# Altium PCB analogtestboard3.PCBDOC (part 3 of 3)
Units mil, origin at the board's own origin, x right, y up, seen from the top; angles counter-clockwise.
Board outline 10000 x 10000 mil, 4 copper layers (Top Layer, Internal Plane 1, Internal Plane 2, Bottom Layer); 448 components, 227 nets, 1474 pads, 451 vias.
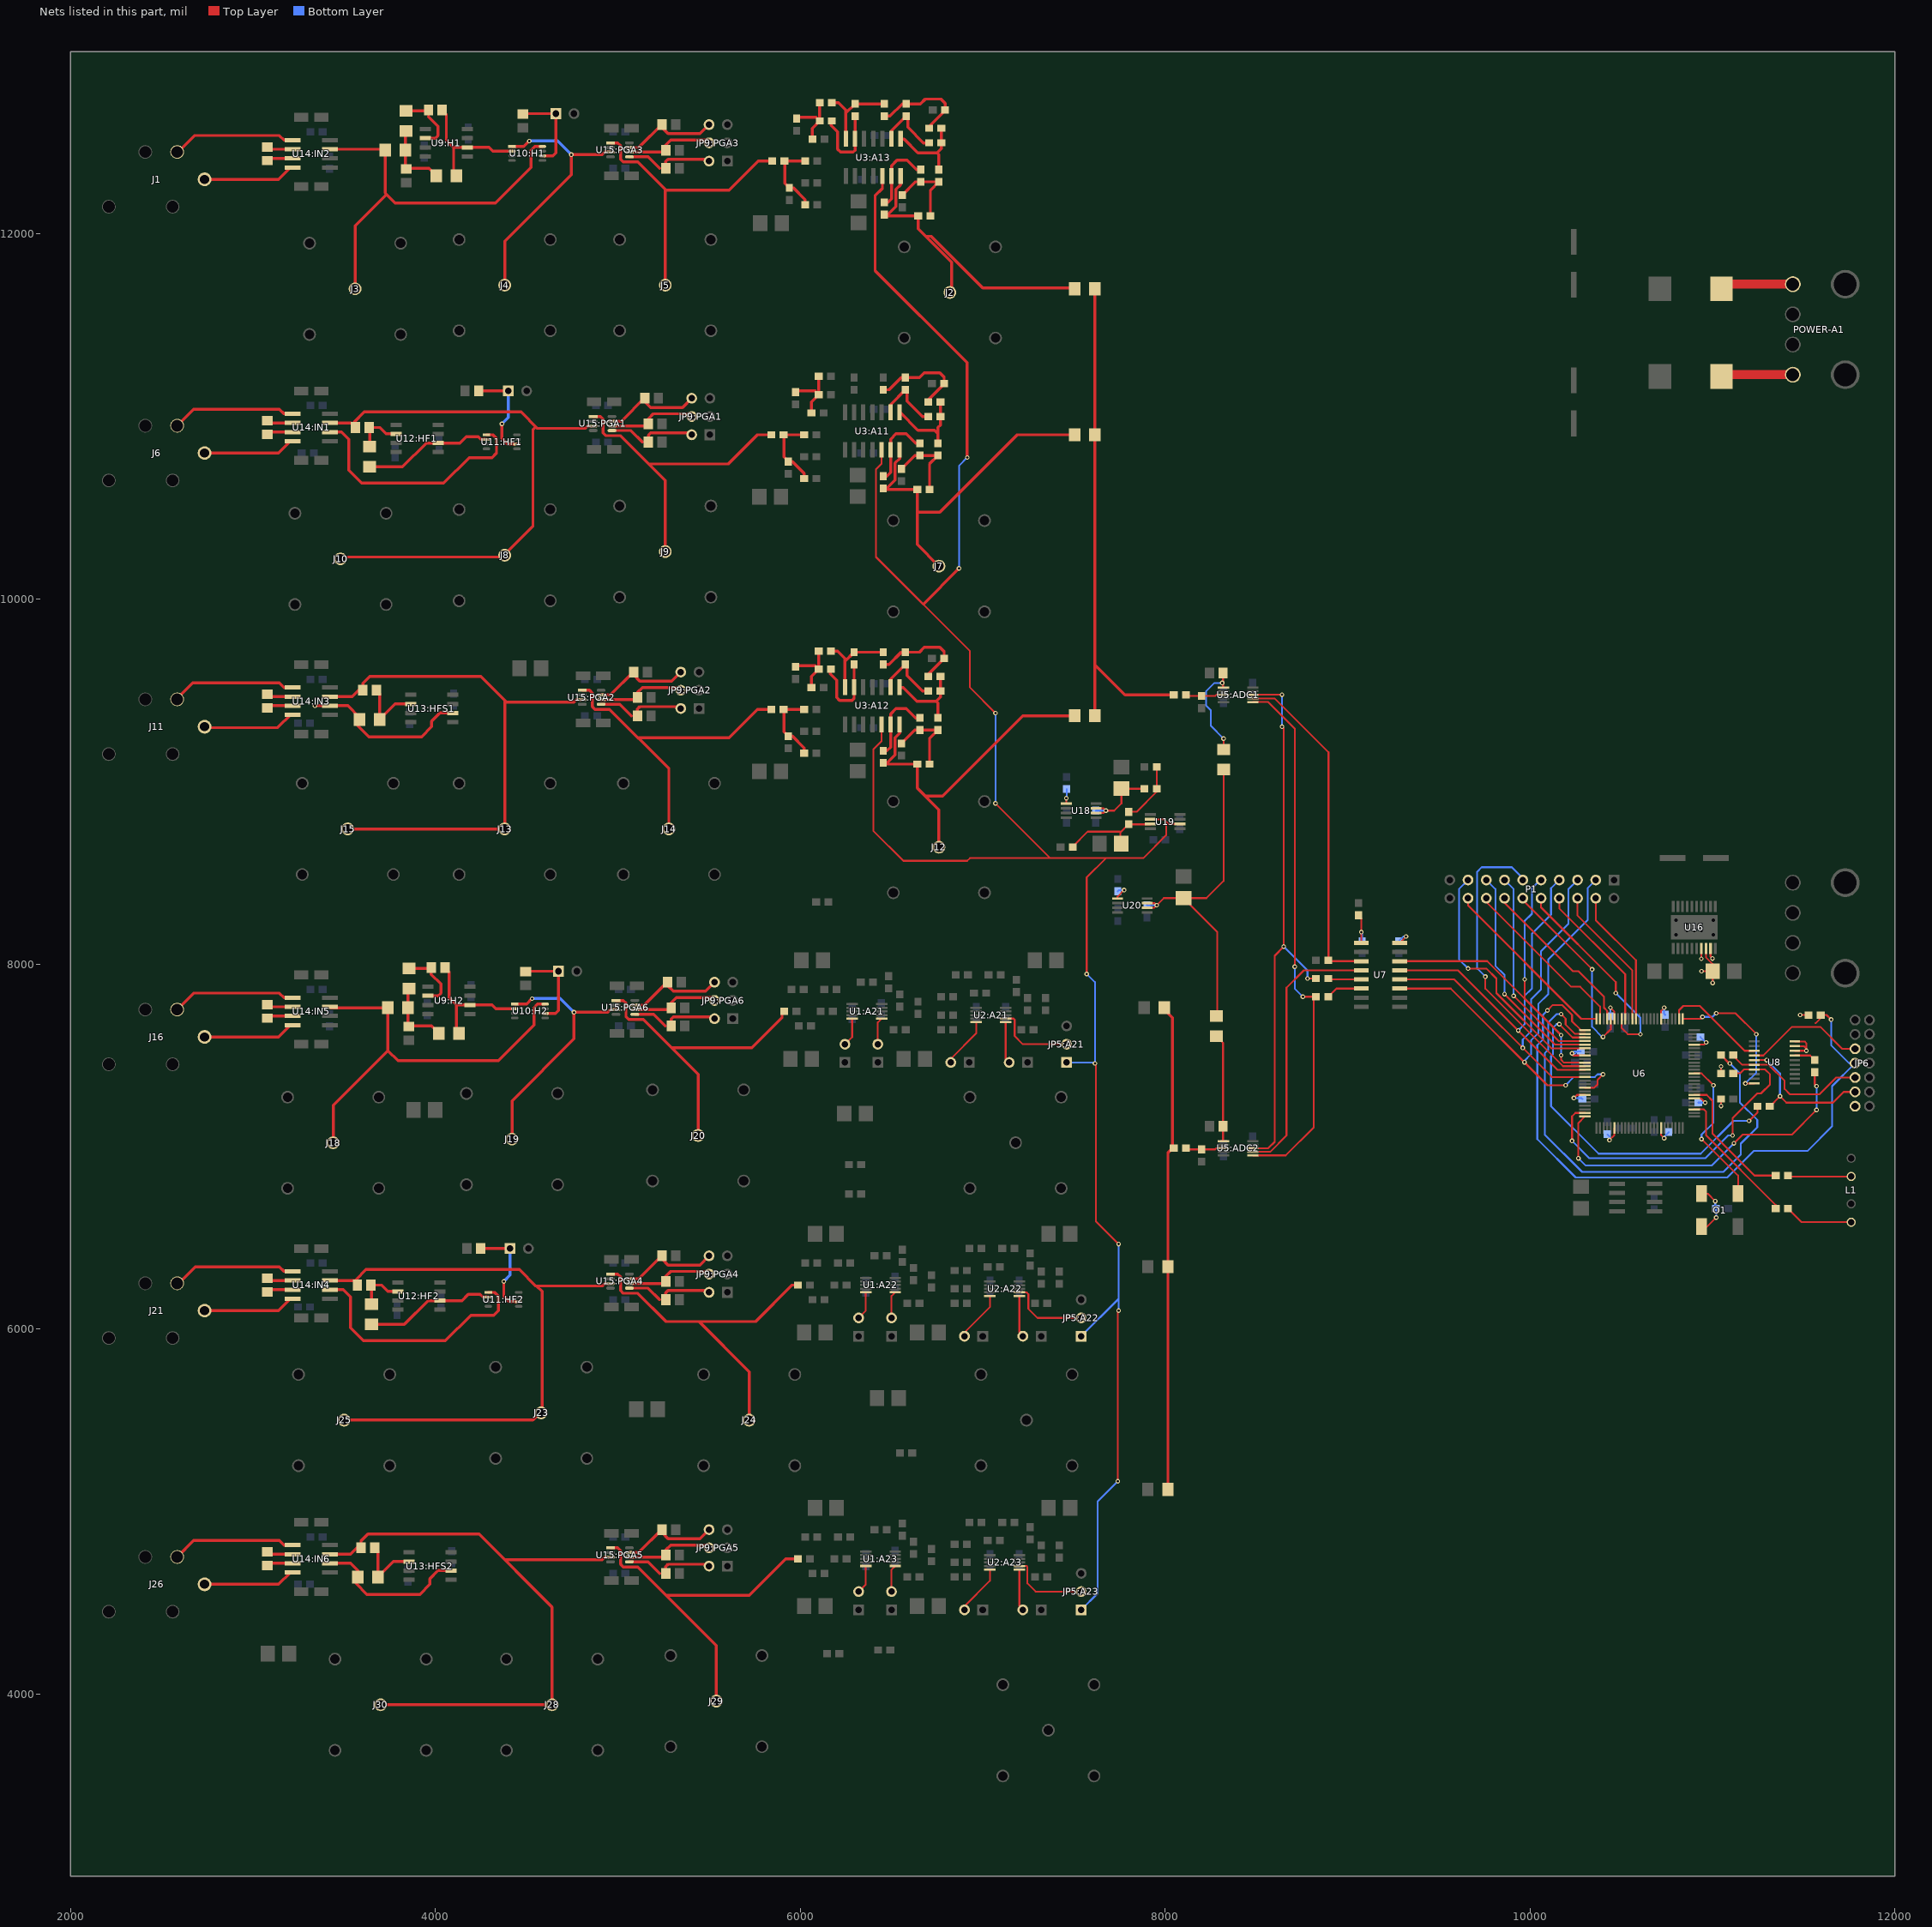
[diagram p5: the nets of this part, all layers, seen from the top]

## Via types
v1: diameter 25, hole 13.5, Top Layer to Bottom Layer, 398 vias
v2: diameter 35, hole 20, Top Layer to Bottom Layer, 53 vias

## Nets (pads, with @x,y where several pads share a name; then routed paths per layer and width w, separated by ;. In a path a pad name is that pad's centre, name@x,y a point inside that pad or via, vN(x,y) a via of type N, cw(c..) or ccw(c..) an arc to the next point about the centre after c; other vN are vias at no path point) (continued)
NetC18:A12_1: C18:A12.1 R14:A12.1 R21:A12.1 U3:A12.14 | length 489.9
  Top Layer w16: R14:A12.1@6168.46,9715 6205,9715 6245,9675 U3:A12.14@6245,9517.36 ; 6245,9658.46 C18:A12.1@6295,9708.46 ; C18:A12.1@6286.54,9708.46 R21:A12.1@6455,9708.46
NetC18:A12_2: C18:A12.2 R20:A12.2 U3:A12.13 | length 474.9
  Top Layer w16: R20:A12.2@6165,9615 6165,9590 6200,9555 6200,9460 6215,9445 6285,9445 6295,9455 C18:A12.2@6295,9655
NetC18:A13_1: C18:A13.1 R14:A13.1 R21:A13.1 U3:A13.14 | length 489.9
  Top Layer w16: R14:A13.1@6173.46,12720 6210,12720 6250,12680 U3:A13.14@6250,12522.36 ; 6250,12663.46 C18:A13.1@6300,12713.46 ; C18:A13.1@6291.54,12713.46 R21:A13.1@6460,12713.46
NetC18:A13_2: C18:A13.2 R20:A13.2 U3:A13.13 | length 474.9
  Top Layer w16: R20:A13.2@6170,12620 6170,12595 6205,12560 6205,12465 6220,12450 6290,12450 6300,12460 C18:A13.2@6300,12660
NetC19:A11_1: C19:A11.1 R15:A11.1 R23:A11.1 U3:A11.8 | length 490.7
  Top Layer w16: U3:A11.8@6545,11022.36 6547.64,11022.36 6645,10925 6735,10925 6755,10905 ; R23:A11.1@6755,10853.46 6755,10940 6768.46,10953.46 R15:A11.1@6768.46,11080
NetC19:A11_2: C19:A11.2 R22:A11.2 U3:A11.9 | length 379.7
  Top Layer w16: U3:A11.9@6495,11022.36 6495,11066.54 R22:A11.2@6575,11146.54 6583.46,11146.54 6585,11145 6585,11085 6670,11000 C19:A11.2@6701.54,11000
NetC19:A12_1: C19:A12.1 R15:A12.1 R23:A12.1 U3:A12.8 | length 472.4
  Top Layer w16: U3:A12.8@6545,9517.36 6547.36,9515 6565,9515 6640,9440 6745,9440 ; R23:A12.1@6755,9348.46 6755,9430 6745,9440 ; R15:A12.1@6768.46,9575 C19:A12.1@6768.46,9495 6768.46,9463.46 6745,9440
NetC19:A12_2: C19:A12.2 R22:A12.2 U3:A12.9 | length 379.7
  Top Layer w16: U3:A12.9@6495,9517.36 6495,9561.54 R22:A12.2@6575,9641.54 6583.46,9641.54 6585,9640 6585,9580 6670,9495 C19:A12.2@6701.54,9495
NetC19:A13_1: C19:A13.1 R15:A13.1 R23:A13.1 U3:A13.8 | length 472.4
  Top Layer w16: U3:A13.8@6550,12522.36 6552.36,12520 6570,12520 6645,12445 6750,12445 ; R23:A13.1@6760,12353.46 6760,12435 6750,12445 ; R15:A13.1@6773.46,12580 C19:A13.1@6773.46,12500 6773.46,12468.46 6750,12445
NetC19:A13_2: C19:A13.2 R22:A13.2 U3:A13.9 | length 379.7
  Top Layer w16: U3:A13.9@6500,12522.36 6500,12566.54 R22:A13.2@6580,12646.54 6588.46,12646.54 6590,12645 6590,12585 6675,12500 C19:A13.2@6706.54,12500
NetC20:A11_1: C20:A11.1 J7.1 R16:A11.1 R46.1 U3:A11.7 | length 1920.1
  Top Layer w16: C20:A11.1@6470,10600 R16:A11.1@6641.54,10600 6641.54,10298.46 J7.1@6760,10180 ; 6475,10606.54 6520,10651.54 6520,10745 6545,10770 U3:A11.7@6545,10817.64 ; 6641.54,10475 6765,10475 7190,10900 R46.1@7504.88,10900
NetC20:A11_2: C20:A11.2 R24:A11.2 U3:A11.6 | length 403.6
  Top Layer w16: 6475,10673.46 6495,10693.46 U3:A11.6@6495,10817.64 6495,10875 6525,10905 6580,10905 6631.54,10853.46 R24:A11.2@6655,10853.46
NetC20:A12_1: C20:A12.1 J12.1 R16:A12.1 R48.1 U3:A12.7 | length 1917.7
  Top Layer w16: C20:A12.1@6470,9095 R16:A12.1@6641.54,9095 6641.54,8963.46 6760,8845 J12.1@6760,8640 ; 6475,9101.54 6520,9146.54 6520,9240 6545,9265 U3:A12.7@6545,9312.64 ; 6685.31,8919.69 6779.69,8919.69 7220,9360 R48.1@7504.88,9360
NetC20:A12_2: C20:A12.2 R24:A12.2 U3:A12.6 | length 403.6
  Top Layer w16: 6475,9168.46 6495,9188.46 U3:A12.6@6495,9312.64 6495,9370 6525,9400 6580,9400 6631.54,9348.46 R24:A12.2@6655,9348.46
NetC20:A13_1: C20:A13.1 J2.1 R16:A13.1 R45.1 U3:A13.7 | length 1842.7
  Top Layer w16: C20:A13.1@6475,12100 R16:A13.1@6646.54,12100 6646.54,12028.46 6830,11845 J2.1@6830,11690 ; 6480,12106.54 6525,12151.54 6525,12245 6550,12270 U3:A13.7@6550,12317.64 ; 6687.11,11987.89 6717.11,11987.89 7000,11705 R45.1@7515,11705
NetC20:A13_2: C20:A13.2 R24:A13.2 U3:A13.6 | length 403.6
  Top Layer w16: 6480,12173.46 6500,12193.46 U3:A13.6@6500,12317.64 6500,12375 6530,12405 6585,12405 6636.54,12353.46 R24:A13.2@6660,12353.46
NetC21:A11_2: C21:A11.2 R13:A11.2 R17:A11.2 R18:A11.1 | length 421.9
  Top Layer w16: R17:A11.2@5908.46,10900 R18:A11.1@6021.54,10900 ; R17:A11.2@5910,10910 5910,10778.46 C21:A11.2@5935,10753.46 5956.54,10753.46 6021.54,10688.46 R13:A11.2@6021.54,10660
NetC21:A12_2: C21:A12.2 R13:A12.2 R17:A12.2 R18:A12.1 | length 421.9
  Top Layer w16: R17:A12.2@5908.46,9395 R18:A12.1@6021.54,9395 ; R17:A12.2@5910,9405 5910,9273.46 C21:A12.2@5935,9248.46 5956.54,9248.46 6021.54,9183.46 R13:A12.2@6021.54,9155
NetC21:A13_2: C21:A13.2 R13:A13.2 R17:A13.2 R18:A13.1 | length 421.9
  Top Layer w16: R17:A13.2@5913.46,12400 R18:A13.1@6026.54,12400 ; R17:A13.2@5915,12410 5915,12278.46 C21:A13.2@5940,12253.46 5961.54,12253.46 6026.54,12188.46 R13:A13.2@6026.54,12160
NetC22:A11_2: C22:A11.2 R14:A11.2 R19:A11.2 R20:A11.1 | length 328.1
  Top Layer w16: C22:A11.2@5970,11140 6081.54,11140 ; R19:A11.2@6061.54,11020 6061.54,11080 R20:A11.1@6101.54,11120 R14:A11.2@6101.54,11220
NetC22:A12_2: C22:A12.2 R14:A12.2 R19:A12.2 R20:A12.1 | length 328.1
  Top Layer w16: C22:A12.2@5970,9635 6081.54,9635 ; R19:A12.2@6061.54,9515 6061.54,9575 R20:A12.1@6101.54,9615 R14:A12.2@6101.54,9715
NetC22:A13_2: C22:A13.2 R14:A13.2 R19:A13.2 R20:A13.1 | length 328.1
  Top Layer w16: C22:A13.2@5975,12640 6086.54,12640 ; R19:A13.2@6066.54,12520 6066.54,12580 R20:A13.1@6106.54,12620 R14:A13.2@6106.54,12720
NetC23:A11_2: C23:A11.2 R15:A11.2 R21:A11.2 R22:A11.1 | length 542.9
  Top Layer w16: R21:A11.2@6455,11146.54 6486.54,11146.54 6553.46,11213.46 6653.46,11213.46 6680,11240 6765,11240 6788.46,11216.54 6788.46,11178.46 R15:A11.2@6701.54,11091.54
NetC23:A12_2: C23:A12.2 R15:A12.2 R21:A12.2 R22:A12.1 | length 542.9
  Top Layer w16: R21:A12.2@6455,9641.54 6486.54,9641.54 6553.46,9708.46 6653.46,9708.46 6680,9735 6765,9735 6788.46,9711.54 6788.46,9673.46 R15:A12.2@6701.54,9586.54
NetC23:A13_2: C23:A13.2 R15:A13.2 R21:A13.2 R22:A13.1 | length 542.9
  Top Layer w16: R21:A13.2@6460,12646.54 6491.54,12646.54 6558.46,12713.46 6658.46,12713.46 6685,12740 6770,12740 6793.46,12716.54 6793.46,12678.46 R15:A13.2@6706.54,12591.54
NetC24:A11_2: C24:A11.2 R16:A11.2 R23:A11.2 R24:A11.1 | length 436.1
  Top Layer w16: C24:A11.2@6555,10713.46 6628.07,10786.54 R24:A11.1@6655,10786.54 R23:A11.2@6755,10786.54 6708.46,10740 R16:A11.2@6708.46,10600
NetC24:A12_2: C24:A12.2 R16:A12.2 R23:A12.2 R24:A12.1 | length 436.1
  Top Layer w16: C24:A12.2@6555,9208.46 6628.07,9281.54 R24:A12.1@6655,9281.54 R23:A12.2@6755,9281.54 6708.46,9235 R16:A12.2@6708.46,9095
NetC24:A13_2: C24:A13.2 R16:A13.2 R23:A13.2 R24:A13.1 | length 436.1
  Top Layer w16: C24:A13.2@6560,12213.46 6633.07,12286.54 R24:A13.1@6660,12286.54 R23:A13.2@6760,12286.54 6713.46,12240 R16:A13.2@6713.46,12100
NetC33:ADC1_2: C33:ADC1.2 R47.1 U5:ADC1.1 | length 544
  Top Layer w10: U5:ADC1.1@8317.4,9516.26 C33:ADC1.2@8317.4,9595 ; R47.1@8320,9175.12 v1(8320,9235)
  Bottom Layer w10: v1(8312.4,9540) 8270,9540 8225,9495 8225,9415 8250,9390 8250,9305 v1(8320,9235)
NetC33:ADC2_2: C33:ADC2.2 R51.1 U5:ADC2.1 | length 589.1
  Top Layer w10: R51.1@8280,7604.88 8317.4,7567.48 U5:ADC2.1@8317.4,7031.26
NetC36:ADC1_2: C36:ADC1.2 R25:ADC1.2 U5:ADC1.3 | length 211.2
  Top Layer w10: R25:ADC1.2@8113.46,9475 8120,9468.46 8273.46,9468.46 8280,9475 U5:ADC1.3@8319.29,9475
NetC36:ADC2_2: C36:ADC2.2 R25:ADC2.2 U5:ADC2.3 | length 211.2
  Top Layer w10: R25:ADC2.2@8113.46,6990 8120,6983.46 8273.46,6983.46 8280,6990 U5:ADC2.3@8319.29,6990
NetC37_2: C37.2 R26.1 U7.1 | length 188.5
  Top Layer w10: U7.1@9074.68,8115 R26.1@9074.68,8251.85
  Bottom Layer w10: v1(9074.68,8174.68) 9080,8169.37 C37.2@9080,8125.21
NetC55:H1_1: C55:H1.1 R38:H1.1 U9:H1.6 U10:H1.2 | length 720.7
  Top Layer w16: R38:H1.1@4037.4,12680 4060,12657.4 4060,12515 4100,12475 ; C55:H1.1@4115.12,12320 4100,12335.12 4100,12475 ; U10:H1.2@4420,12454.41 4315.59,12454.41 4295,12475 4100,12475
NetC55:H1_2: C55:H1.2 C57:H1.1 C58:H1.2 R39:H1.2 | length 389.3
  Top Layer w16: R39:H1.2@3835.12,12362.28 C58:H1.2@3835.12,12570.12 ; R39:H1.2@3840,12360 3964.88,12360 C55:H1.2@4004.88,12320
NetC55:H2_1: C55:H2.1 R38:H2.1 U9:H2.6 U10:H2.2 | length 720.7
  Top Layer w16: R38:H2.1@4052.4,7980 4075,7957.4 4075,7815 4115,7775 ; C55:H2.1@4130.12,7620 4115,7635.12 4115,7775 ; U10:H2.2@4435,7754.41 4330.59,7754.41 4310,7775 4115,7775
NetC55:H2_2: C55:H2.2 C57:H2.1 C58:H2.2 R39:H2.2 | length 389.3
  Top Layer w16: R39:H2.2@3850.12,7662.28 C58:H2.2@3850.12,7870.12 ; R39:H2.2@3855,7660 3979.88,7660 C55:H2.2@4019.88,7620
NetC57:H1_2: C57:H1.2 J3.1 U10:H1.8 U14:IN2.7 | length 2190.5
  Top Layer w16: U14:IN2.7@3422.36,12465 C57:H1.2@3719.88,12465 ; J3.1@3560,11700 3560,12045.82 3732.09,12217.91 ; C57:H1.2@3724.88,12460 3724.88,12225.12 3780,12170 4330,12170 4525,12365 4525,12460 4545,12480 U10:H1.8@4586.93,12480
NetC57:H2_2: C57:H2.2 J18.1 U10:H2.8 U14:IN5.7 | length 2252.7
  Top Layer w16: U14:IN5.7@3422.36,7765 3427.36,7760 C57:H2.2@3739.88,7760 3739.88,7525.12 ; J18.1@3440,7020 3440,7225.24 3739.88,7525.12 ; U10:H2.8@4601.93,7780 4560,7780 4540,7760 4540,7665 4345,7470 3795,7470 3739.88,7525.12
NetC58:H1_1: C58:H1.1 R38:H1.2 U9:H1.2 | length 355.8
  Top Layer w10: 3962.6,12642.4 R38:H1.2@3962.6,12680
  Top Layer w16: C58:H1.1@3840,12675.12 R38:H1.2@3957.72,12675.12 ; U9:H1.2@3944.84,12525 4000,12525 4015,12540 4015,12590 3962.6,12642.4
NetC58:H2_1: C58:H2.1 R38:H2.2 U9:H2.2 | length 346
  Top Layer w16: C58:H2.1@3855,7975.12 R38:H2.2@3972.72,7975.12 ; U9:H2.2@3959.84,7825 4015,7825 4030,7840 4030,7890 3977.6,7942.4 R38:H2.2@3977.6,7970.24
NetC60:HF1_1: C60:HF1.1 R41:HF1.2 U12:HF1.2 | length 271.3
  Top Layer w16: C60:HF1.1@3640,10835.12 3640,10935 3635,10940 3695,10940 3730,10905 U12:HF1.2@3784.84,10905
NetC60:HF1_2: C60:HF1.2 U11:HF1.2 U12:HF1.6 | length 714.9
  Top Layer w16: C60:HF1.2@3640,10724.88 3819.88,10724.88 3950,10855 4135,10855 4170,10890 4235,10890 4250.59,10874.41 U11:HF1.2@4280,10874.41
NetC60:HF2_1: C60:HF2.1 R41:HF2.2 U12:HF2.2 | length 271.3
  Top Layer w16: C60:HF2.1@3650,6135.12 3650,6235 3645,6240 3705,6240 3740,6205 U12:HF2.2@3794.84,6205
NetC60:HF2_2: C60:HF2.2 U11:HF2.2 U12:HF2.6 | length 714.9
  Top Layer w16: C60:HF2.2@3650,6024.88 3829.88,6024.88 3960,6155 4145,6155 4180,6190 4245,6190 4260.59,6174.41 U11:HF2.2@4290,6174.41
NetC63:HFS1_1: C63:HFS1.1 R43:HFS1.2 U13:HFS1.2 | length 372.3
  Top Layer w16: R43:HFS1.2@3677.4,9500 3695.12,9482.28 C63:HFS1.1@3695.12,9340 3780.12,9425 U13:HFS1.2@3864.84,9425
NetC63:HFS1_2: C63:HFS1.2 U13:HFS1.6 U14:IN3.6 | length 938.3
  Top Layer w16: v1(3340,9415) 3520,9415 3584.88,9350.12 C63:HFS1.2@3584.88,9340 ; C63:HFS1.2@3575,9345 3575,9305 3635,9245 3925,9245 3980,9300 3980,9330 4025,9375 U13:HFS1.6@4095.16,9375
NetC63:HFS2_1: C63:HFS2.1 R43:HFS2.2 U13:HFS2.2 | length 372.3
  Top Layer w16: R43:HFS2.2@3667.4,4800 3685.12,4782.28 C63:HFS2.1@3685.12,4640 3770.12,4725 U13:HFS2.2@3854.84,4725
NetC63:HFS2_2: C63:HFS2.2 U13:HFS2.6 U14:IN6.6 | length 860.6
  Top Layer w16: U14:IN6.6@3422.36,4715 3535,4715 3574.88,4675.12 C63:HFS2.2@3574.88,4640 ; C63:HFS2.2@3565,4645 3565,4605 3625,4545 3915,4545 3970,4600 3970,4630 4015,4675 U13:HFS2.6@4085.16,4675
NetC81_1: C81.1 C83.1 R56.2 U18.6 U18.7 | length 478.6
  Top Layer w10: U18.6@7621.69,8827.2 7662.2,8827.2 v1(7675,8840) ; U18.7@7621.69,8852.79 7662.21,8852.79 v1(7675,8840) ; C81.1@7760,8960.94 7760,8880 7720,8840 v1(7675,8840) ; C81.1@7760.94,8960 R56.2@7886.54,8960
  Bottom Layer w10: C83.1@7621.71,8840 v1(7675,8840)
NetC85_1: C85.1 U18.1 | length 80.6
  Top Layer w10: U18.1@7458.31,8878.39 v1(7458.31,8908.31)
  Bottom Layer w10: v1(7458.31,8908.31) 7460,8910 C85.1@7460,8958.29
NetC87_1: C87.1 C88.1 R57.1 U19.3 | length 543.9
  Top Layer w10: C88.1@7493.46,8640 7493.46,8643.46 7575,8725 7751.54,8725 ; C87.1@7755,8655 7755,8721.54 R57.1@7800,8766.54 ; R57.1@7801.54,8765 U19.3@7920,8765
NetC92_1: C92.1 U20.1 | length 99.6
  Top Layer w10: U20.1@7738.31,8358.39 7738.31,8368.31 v1(7775,8405)
  Bottom Layer w10: C92.1@7740,8398.29 7746.71,8405 v1(7775,8405)
NetJ1_2: J1.2 U14:IN2.1 | length 682.3
  Top Layer w16: J1.2@2585,12445 2680,12540 3145,12540 3170,12515 U14:IN2.1@3217.64,12515
NetJ1_3: J1.3 U14:IN2.4 | length 494.6
  Top Layer w16: J1.3@2750,12300 3140,12300 3205,12365 U14:IN2.4@3217.64,12365
NetJ4_1: J4.1 U10:H1.1 U15:PGA3.3 | length 1455.4
  Top Layer w16: J4.1@4380,11720 4380,11960 4745,12325 v1(4745,12435) 4915,12435 4928.82,12448.82 U15:PGA3.3@4960,12448.82 ; U10:H1.1@4420,12480 4485,12480 v1(4515,12510)
  Bottom Layer w16: v1(4515,12510) 4670,12510 v1(4745,12435)
NetJ5_1: J5.1 R17:A13.1 U15:PGA3.1 | length 1619.4
  Top Layer w16: U15:PGA3.1@4960,12500 5000,12500 5015,12485 5015,12410 5030,12395 5110,12395 5265,12240 5610,12240 5770,12400 R17:A13.1@5846.54,12400 ; J5.1@5260,11730 5260,12245
NetJ6_2: J6.2 U14:IN1.1 | length 680.3
  Top Layer w16: J6.2@2585,10950 2675,11040 3145,11040 3170,11015 U14:IN1.1@3217.64,11015
NetJ6_3: J6.3 U14:IN1.4 | length 514.6
  Top Layer w16: J6.3@2730,10800 3140,10800 3205,10865 U14:IN1.4@3217.64,10865
NetJ8_1: J8.1 J10.1 R41:HF1.1 U14:IN1.7 U15:PGA1.3 | length 3237.6
  Top Layer w16: U14:IN1.7@3422.36,10965 3537.6,10965 R41:HF1.1@3562.6,10940 ; J10.1@3485,10230 4365,10230 4535,10400 4535,10928.56 4550.72,10944.28 ; R41:HF1.1@3555,10930 3555,10970 3610,11025 4470,11025 4560,10935 4820,10935 4833.82,10948.82 U15:PGA1.3@4865,10948.82
NetJ9_1: J9.1 R17:A11.1 U15:PGA1.1 | length 1711.7
  Top Layer w16: U15:PGA1.1@4865,11000 4905,11000 4920,10985 4920,10910 4935,10895 5015,10895 5260,10650 J9.1@5260,10260 ; 5170,10740 5605,10740 5765,10900 R17:A11.1@5841.54,10900
NetJ11_2: J11.2 U14:IN3.1 | length 671.1
  Top Layer w16: J11.2@2590,9460 2670,9540 3145,9540 3170,9515 U14:IN3.1@3217.64,9515
NetJ11_3: J11.3 U14:IN3.4 | length 514.6
  Top Layer w16: J11.3@2725,9295 3135,9295 ; 3140,9300 3205,9365 U14:IN3.4@3217.64,9365
NetJ13_1: J13.1 J15.1 R43:HFS1.1 U14:IN3.7 U15:PGA2.3 | length 3078.9
  Top Layer w16: U14:IN3.7@3422.36,9465 3545,9465 3580,9500 R43:HFS1.1@3602.6,9500 3602.6,9537.6 3640,9575 4250,9575 4390,9435 4760,9435 4773.82,9448.82 U15:PGA2.3@4805,9448.82 ; J15.1@3520,8740 J13.1@4380,8740 4380,9445
NetJ14_1: J14.1 R17:A12.1 U15:PGA2.1 | length 1822.8
  Top Layer w16: U15:PGA2.1@4805,9500 4845,9500 4860,9485 4860,9410 4875,9395 4955,9395 5280,9070 J14.1@5280,8740 ; 5110,9240 5610,9240 5765,9395 R17:A12.1@5841.54,9395
NetJ16_2: J16.2 U14:IN5.1 | length 680.3
  Top Layer w16: J16.2@2585,7750 2675,7840 3145,7840 3170,7815 U14:IN5.1@3217.64,7815
NetJ16_3: J16.3 U14:IN5.4 | length 499.6
  Top Layer w16: J16.3@2745,7600 3140,7600 3205,7665 U14:IN5.4@3217.64,7665
NetJ19_1: J19.1 U10:H2.1 U15:PGA6.3 | length 1440
  Top Layer w16: J19.1@4420,7040 4420,7250 4760,7590 v1(4760,7735) 4945,7735 4958.82,7748.82 U15:PGA6.3@4990,7748.82 ; U10:H2.1@4435,7780 4500,7780 v1(4530,7810)
  Bottom Layer w16: v1(4530,7810) 4685,7810 v1(4760,7735)
NetJ20_1: J20.1 R5:A21.1 U15:PGA6.1 | length 1715
  Top Layer w16: U15:PGA6.1@4990,7800 5030,7800 5045,7785 5045,7710 5060,7695 5140,7695 5440,7395 J20.1@5440,7050 ; 5295,7540 5735,7540 5900,7705 R5:A21.1@5900,7740
NetJ21_2: J21.2 U14:IN4.1 | length 670.3
  Top Layer w16: J21.2@2595,6250 2685,6340 3145,6340 3170,6315 U14:IN4.1@3217.64,6315
NetJ21_3: J21.3 U14:IN4.4 | length 509.6
  Top Layer w16: J21.3@2735,6100 3140,6100 3205,6165 U14:IN4.4@3217.64,6165
NetJ23_1: J23.1 J25.1 R41:HF2.1 U14:IN4.7 U15:PGA4.3 | length 3449.1
  Top Layer w16: U14:IN4.7@3422.36,6265 3555,6265 R41:HF2.1@3565,6255 ; J25.1@3500,5500 4535,5500 4585,5550 4585,6205 4555,6235 ; R41:HF2.1@3561.3,6251.3 R41:HF2.1@3572.6,6240 ; R41:HF2.1@3565,6247.6 3565,6270 3620,6325 4460,6325 4550,6235 4915,6235 4928.82,6248.82 U15:PGA4.3@4960,6248.82
NetJ24_1: J24.1 R5:A22.1 U15:PGA4.1 | length 1914.9
  Top Layer w16: U15:PGA4.1@4960,6300 5000,6300 5015,6285 5015,6210 5030,6195 5110,6195 5265,6040 5755,6040 5955,6240 R5:A22.1@5986.54,6240 ; 5445,6040 5720,5765 J24.1@5720,5500
NetJ26_2: J26.2 U14:IN6.1 | length 680.3
  Top Layer w16: J26.2@2585,4750 2675,4840 3145,4840 3170,4815 U14:IN6.1@3217.64,4815
NetJ26_3: J26.3 U14:IN6.4 | length 494.6
  Top Layer w16: J26.3@2750,4600 3140,4600 3205,4665 U14:IN6.4@3217.64,4665
NetJ28_1: J28.1 J30.1 R43:HFS2.1 U14:IN6.7 U15:PGA5.3 | length 3527.8
  Top Layer w16: U14:IN6.7@3422.36,4765 3535,4765 3570,4800 R43:HFS2.1@3592.6,4800 3592.6,4837.6 3630,4875 4240,4875 4640,4475 J28.1@4640,3940 ; J30.1@3700,3940 4635,3940 J28.1@4650,3955 ; 4380,4735 4915,4735 4928.82,4748.82 U15:PGA5.3@4960,4748.82
NetJ29_1: J29.1 R5:A23.1 U15:PGA5.1 | length 1954.9
  Top Layer w16: U15:PGA5.1@4960,4800 5000,4800 5015,4785 5015,4710 5030,4695 5110,4695 5540,4265 J29.1@5540,3960 ; 5265,4540 5720,4540 5920,4740 R5:A23.1@5986.54,4740
NetJP5:A21_2: JP5:A21.2 U2:A21.7 | length 445.1
  Top Layer w10: U2:A21.7@7125.71,7700.31 7169.69,7700.31 7175,7695 7175,7605 7220,7560 JP5:A21.2@7460,7560
NetJP5:A22_2: JP5:A22.2 U2:A22.7 | length 444.3
  Top Layer w10: U2:A22.7@7200.71,6200.31 7239.69,6200.31 7250,6190 7250,6110 7300,6060 JP5:A22.2@7540,6060
NetJP5:A23_2: JP5:A23.2 U2:A23.7 | length 450.1
  Top Layer w10: U2:A23.7@7200.71,4700.31 7239.69,4700.31 7245,4695 7245,4605 7290,4560 JP5:A23.2@7540,4560
NetJP7:H1_1: JP7:H1.1 R40:H1.2 U10:H1.6 | length 467.2
  Top Layer w16: R40:H1.2@4482.6,12660 JP7:H1.1@4660,12660 ; U10:H1.6@4586.93,12428.82 4643.82,12428.82 4660,12445 JP7:H1.1@4660,12655
NetJP7:H2_1: JP7:H2.1 R40:H2.2 U10:H2.6 | length 467.2
  Top Layer w16: R40:H2.2@4497.6,7960 JP7:H2.1@4675,7960 ; U10:H2.6@4601.93,7728.82 4658.82,7728.82 4675,7745 JP7:H2.1@4675,7955
NetJP8:HF1_1: JP8:HF1.1 R42:HF1.2 U11:HF1.6 | length 551.9
  Top Layer w16: R42:HF1.2@4225,11140 JP8:HF1.1@4400,11140 JP8:HF1.1@4400,11130 ; v1(4365,10960) 4365,10880 4395,10850 U11:HF1.6@4445,10850
  Bottom Layer w16: v1(4365,10960) 4400,10995 JP8:HF1.1@4400,11140
NetJP8:HF2_1: JP8:HF2.1 R42:HF2.2 U11:HF2.6 | length 551.9
  Top Layer w16: R42:HF2.2@4235,6440 JP8:HF2.1@4410,6440 JP8:HF2.1@4410,6430 ; v1(4375,6260) 4375,6180 4405,6150 U11:HF2.6@4455,6150
  Bottom Layer w16: v1(4375,6260) 4410,6295 JP8:HF2.1@4410,6440
NetJP9:PGA1_2: JP9:PGA1.2 R53:PGA1.1 U15:PGA1.5 | length 463.2
  Top Layer w16: U15:PGA1.5@4968.15,10923.23 5071.77,10923.23 5135,10860 ; R53:PGA1.1@5167.6,10860 5167.6,10897.6 5180,10910 JP9:PGA1.2@5395,10910
NetJP9:PGA1_4: JP9:PGA1.4 R54:PGA1.1 U15:PGA1.6 | length 471.2
  Top Layer w16: U15:PGA1.6@4968.15,10948.82 R54:PGA1.1@5158.82,10948.82 ; R54:PGA1.1@5167.6,10960 5167.6,10987.6 5195,11015 5395,11015 JP9:PGA1.4@5405,11005
NetJP9:PGA1_6: JP9:PGA1.6 R55:PGA1.1 U15:PGA1.7 | length 545.1
  Top Layer w16: U15:PGA1.7@4968.15,10974.41 5019.41,10974.41 R55:PGA1.1@5150,11105 ; R55:PGA1.1@5147.6,11100 5147.6,11082.4 5180,11050 5355,11050 JP9:PGA1.6@5405,11100
NetJP9:PGA2_2: JP9:PGA2.2 R53:PGA2.1 U15:PGA2.5 | length 463.2
  Top Layer w16: U15:PGA2.5@4908.15,9423.23 5011.77,9423.23 5075,9360 ; R53:PGA2.1@5107.6,9360 5107.6,9397.6 5120,9410 JP9:PGA2.2@5335,9410
NetJP9:PGA2_4: JP9:PGA2.4 R54:PGA2.1 U15:PGA2.6 | length 471.2
  Top Layer w16: U15:PGA2.6@4908.15,9448.82 R54:PGA2.1@5098.82,9448.82 ; R54:PGA2.1@5107.6,9460 5107.6,9487.6 5135,9515 5335,9515 JP9:PGA2.4@5345,9505
NetJP9:PGA2_6: JP9:PGA2.6 R55:PGA2.1 U15:PGA2.7 | length 545.1
  Top Layer w16: U15:PGA2.7@4908.15,9474.41 4959.41,9474.41 R55:PGA2.1@5090,9605 ; R55:PGA2.1@5087.6,9600 5087.6,9582.4 5120,9550 5295,9550 JP9:PGA2.6@5345,9600
NetJP9:PGA3_2: JP9:PGA3.2 R53:PGA3.1 U15:PGA3.5 | length 463.2
  Top Layer w16: U15:PGA3.5@5063.15,12423.23 5166.77,12423.23 5230,12360 ; R53:PGA3.1@5262.6,12360 5262.6,12397.6 5275,12410 JP9:PGA3.2@5490,12410
NetJP9:PGA3_4: JP9:PGA3.4 R54:PGA3.1 U15:PGA3.6 | length 471.2
  Top Layer w16: U15:PGA3.6@5063.15,12448.82 R54:PGA3.1@5253.82,12448.82 ; R54:PGA3.1@5262.6,12460 5262.6,12487.6 5290,12515 5490,12515 JP9:PGA3.4@5500,12505
NetJP9:PGA3_6: JP9:PGA3.6 R55:PGA3.1 U15:PGA3.7 | length 545.1
  Top Layer w16: U15:PGA3.7@5063.15,12474.41 5114.41,12474.41 R55:PGA3.1@5245,12605 ; R55:PGA3.1@5242.6,12600 5242.6,12582.4 5275,12550 5450,12550 JP9:PGA3.6@5500,12600
NetJP9:PGA4_2: JP9:PGA4.2 R53:PGA4.1 U15:PGA4.5 | length 463.2
  Top Layer w16: U15:PGA4.5@5063.15,6223.23 5166.77,6223.23 5230,6160 ; R53:PGA4.1@5262.6,6160 5262.6,6197.6 5275,6210 JP9:PGA4.2@5490,6210
NetJP9:PGA4_4: JP9:PGA4.4 R54:PGA4.1 U15:PGA4.6 | length 471.2
  Top Layer w16: U15:PGA4.6@5063.15,6248.82 R54:PGA4.1@5253.82,6248.82 ; R54:PGA4.1@5262.6,6260 5262.6,6287.6 5290,6315 5490,6315 JP9:PGA4.4@5500,6305
NetJP9:PGA4_6: JP9:PGA4.6 R55:PGA4.1 U15:PGA4.7 | length 545.1
  Top Layer w16: U15:PGA4.7@5063.15,6274.41 5114.41,6274.41 R55:PGA4.1@5245,6405 ; R55:PGA4.1@5242.6,6400 5242.6,6382.4 5275,6350 5450,6350 JP9:PGA4.6@5500,6400
NetJP9:PGA5_2: JP9:PGA5.2 R53:PGA5.1 U15:PGA5.5 | length 463.2
  Top Layer w16: U15:PGA5.5@5063.15,4723.23 5166.77,4723.23 5230,4660 ; R53:PGA5.1@5262.6,4660 5262.6,4697.6 5275,4710 JP9:PGA5.2@5490,4710
NetJP9:PGA5_4: JP9:PGA5.4 R54:PGA5.1 U15:PGA5.6 | length 471.2
  Top Layer w16: U15:PGA5.6@5063.15,4748.82 R54:PGA5.1@5253.82,4748.82 ; R54:PGA5.1@5262.6,4760 5262.6,4787.6 5290,4815 5490,4815 JP9:PGA5.4@5500,4805
NetJP9:PGA5_6: JP9:PGA5.6 R55:PGA5.1 U15:PGA5.7 | length 545.1
  Top Layer w16: U15:PGA5.7@5063.15,4774.41 5114.41,4774.41 R55:PGA5.1@5245,4905 ; R55:PGA5.1@5242.6,4900 5242.6,4882.4 5275,4850 5450,4850 JP9:PGA5.6@5500,4900
NetJP9:PGA6_2: JP9:PGA6.2 R53:PGA6.1 U15:PGA6.5 | length 463.2
  Top Layer w16: U15:PGA6.5@5093.15,7723.23 5196.77,7723.23 5260,7660 ; R53:PGA6.1@5292.6,7660 5292.6,7697.6 5305,7710 JP9:PGA6.2@5520,7710
NetJP9:PGA6_4: JP9:PGA6.4 R54:PGA6.1 U15:PGA6.6 | length 471.2
  Top Layer w16: U15:PGA6.6@5093.15,7748.82 R54:PGA6.1@5283.82,7748.82 ; R54:PGA6.1@5292.6,7760 5292.6,7787.6 5320,7815 5520,7815 JP9:PGA6.4@5530,7805
NetJP9:PGA6_6: JP9:PGA6.6 R55:PGA6.1 U15:PGA6.7 | length 545.1
  Top Layer w16: U15:PGA6.7@5093.15,7774.41 5144.41,7774.41 R55:PGA6.1@5275,7905 ; R55:PGA6.1@5272.6,7900 5272.6,7882.4 5305,7850 5480,7850 JP9:PGA6.6@5530,7900
NetL1_1: L1.1 R30.2 | length 377.7
  Top Layer w10: R30.2@11413.46,6660 11488.66,6584.8 L1.1@11760,6584.8
NetL1_3: L1.3 R31.2 | length 348.6
  Top Layer w10: R31.2@11413.46,6840 11418.46,6835 L1.3@11760,6835
NetL2_1: L2.1 POWER-A1.4 | length 381.7
  Top Layer w50: L2.1@11058.29,11229.29 POWER-A1.4@11440,11229.29
NetL3_1: L3.1 POWER-A1.1 | length 401.5
  Top Layer w50: L3.1@11049,11700 11074.35,11725.35 POWER-A1.1@11440,11725.35
NetO1_5: O1.5 U6.38 | length 836.4
  Top Layer w10: U6.38@10899.21,7400 10940,7400 v1(11005,7335) ; v1(10940,7040) 11140,6840 O1.5@11140,6741.1
  Bottom Layer w10: v1(10940,7040) 10940,7065 11005,7130 v1(11005,7335)
NetP1_3: P1.3 U6.92 U7.11 | length 2664.4
  Top Layer w10: U7.11@9285.31,7865 9565,7865 10095,7335 v1(10195,7335) ; U6.92@10300.79,7321.26 10351.26,7321.26 10370,7340 10370,7365 v1(10400,7395)
  Bottom Layer w10: v1(9968.98,7461.02) 9968.98,7468.98 10005,7505 10005,7580 10045,7620 10045,7780 10100,7835 10100,8025 10315,8240 10315,8415 P1.3@10360,8460 ; v1(10195,7335) 10240,7380 10355,7380 10370,7395 v1(10400,7395)
NetP1_4: P1.4 U6.64 | length 762
  Top Layer w10: P1.4@10360,8370 10360,8240 10580.31,8019.69 U6.64@10580.31,7699.21
NetP1_5: P1.5 U6.89 U7.12 | length 2281.2
  Top Layer w10: U7.12@9285.31,7915 9585,7915 10119.68,7380.32 U6.89@10300.79,7380.32
  Bottom Layer w10: v1(9960,7540) 9960,7585 10005,7630 10005,7805 10060,7860 10060,8070 10210,8220 10210,8410 P1.5@10260,8460
NetP1_6: P1.6 U6.65 | length 785.3
  Top Layer w10: P1.6@10260,8360 10260,8265 10560.63,7964.37 U6.65@10560.63,7699.21
NetP1_7: P1.7 U6.87 U7.13 | length 2164.5
  Top Layer w10: U7.13@9285.31,7965 9605,7965 10150.31,7419.69 U6.87@10300.79,7419.69
  Bottom Layer w10: v1(9935,7635) 9970,7670 9970,7825 10010,7865 10010,8165 10115,8270 10115,8415 P1.7@10160,8460 ; v1@9940,7645 9945,7645
NetP1_8: P1.8 U6.67 | length 810.4
  Top Layer w10: P1.8@10160,8360 10160,8305 10521.26,7943.74 U6.67@10521.26,7699.21
NetP1_9: P1.9 U6.85 U7.14 | length 2015
  Top Layer w10: U7.14@9285.31,8015 9765,8015 v1(10170,7610) ; 9970,7810 v1(9970,7915) ; v1(10170,7499.04) 10170,7475 10185.94,7459.06 U6.85@10300.79,7459.06
  Bottom Layer w10: v1(9970,7915) 9970,8235 10010,8275 10010,8415 10055,8460 P1.9@10060,8460 ; v1(10170,7499.04) v1(10170,7610)
NetP1_10: P1.10 U6.68 | length 1138.8
  Top Layer w10: P1.10@10060,8360 10060,8310 10470,7900 v1(10470,7840) ; U6.68@10501.57,7699.21 10501.57,7648.43 10535,7615 v1(10605,7615)
  Bottom Layer w10: v1(10470,7840) 10605,7705 v1(10605,7615)
NetP1_11: P1.11 U6.86 | length 1675.9
  Top Layer w10: v1(9755,7930) 9755,7865 10180.63,7439.37 U6.86@10300.79,7439.37
  Bottom Layer w10: v1(9755,7930) 9710,7975 9710,8505 9735,8530 9900,8530 9960,8470 P1.11@9960,8460
NetP1_12: P1.12 U6.71 | length 1059.1
  Top Layer w10: P1.12@9955,8355 v1(10340,7970) ; v1(10400,7600) 10442.52,7642.52 U6.71@10442.52,7699.21
  Bottom Layer w10: v1(10340,7970) 10340,7655 10395,7600 v1(10400,7600)
NetP1_13: P1.13 U6.79 | length 1149.2
  Top Layer w10: v1(9910,7825) 10157.83,7577.17 U6.79@10300.79,7577.17
  Bottom Layer w10: P1.13@9860,8460 9910,8410 v1(9910,7825)
NetP1_14: P1.14 U6.72 | length 911.5
  Top Layer w10: P1.14@9860,8360 9860,8335 10235,7960 10265,7960 10405,7820 10405,7760 10422.83,7742.17 U6.72@10422.83,7699.21
NetP1_15: P1.15 U6.80 | length 1222.2
  Top Layer w10: v1(9860,7835) 10137.52,7557.48 U6.80@10300.79,7557.48
  Bottom Layer w10: P1.15@9760,8460 9810,8410 9810,7990 9860,7940 v1(9860,7835)
NetP1_16: P1.16 U6.74 | length 948.3
  Top Layer w10: P1.16@9760,8360 9760,8340 10225,7875 10275,7875 10383.46,7766.54 U6.74@10383.46,7699.21
NetP1_17: P1.17 U6.81 | length 1395.2
  Top Layer w10: v1(9660,7975) 9760,7975 9815,7920 9815,7840 10117.2,7537.8 U6.81@10300.79,7537.8
  Bottom Layer w10: v1(9660,7975) 9610,8025 9610,8410 P1.17@9660,8460
NetP1_18: P1.18 U6.75 | length 1000.9
  Top Layer w10: P1.18@9660,8360 9660,8320 10280.79,7699.21 U6.75@10363.78,7699.21
NetR25:ADC1_1: R25:ADC1.1 R45.2 R46.2 R48.2 | length 2839.7
  Top Layer w16: R45.2@7615,11700 R48.2@7615.12,9360 ; 7615.12,9639.88 7780,9475 R25:ADC1.1@8046.54,9475
NetR25:ADC2_1: R25:ADC2.1 R49.2 R50.2 R52.2 | length 2666
  Top Layer w16: R49.2@7990,7755 8040,7705 8040,6990 8015.12,6965.12 R52.2@8015.12,5120
NetR27_2: R27.2 U5:ADC1.7 U7.3 | length 1857.8
  Top Layer w10: U5:ADC1.7@8480.71,9455.31 8599.69,9455.31 8895,9160 R27.2@8895,8015 ; R27.2@8898.46,8015 U7.3@9074.68,8015
NetR28_1: R28.1 U5:ADC1.8 U5:ADC2.8 | length 3043.3
  Top Layer w10: U5:ADC2.8@8480.71,6990 8565,6990 8600,7025 8600,8045 v1(8650,8095) 8650,9290 v1(8640,9300) ; U5:ADC1.8@8480.71,9475 v1(8640,9475) ; v1(8780,7920) R28.1@8826.54,7920
  Bottom Layer w10: v1(8640,9300) v1(8640,9475) ; v1(8650,8095) 8780,7965 v1(8780,7920)
NetR28_2: R28.2 U7.5 | length 176.2
  Top Layer w10: R28.2@8898.46,7915 U7.5@9074.68,7915
NetR29_1: R29.1 U5:ADC1.6 U5:ADC2.6 | length 2968
  Top Layer w10: U5:ADC2.6@8480.71,6950.63 8660.63,6950.63 8815,7105 R29.1@8815,7825 ; U5:ADC1.6@8480.71,9435.63 8564.37,9435.63 8710,9290 v1(8710,7985) ; v1(8755,7820) R29.1@8826.54,7820
  Bottom Layer w10: v1(8710,7985) 8710,7865 v1(8755,7820)
NetR29_2: R29.2 U7.6 | length 199.9
  Top Layer w10: R29.2@8893.46,7820 8938.46,7865 U7.6@9074.68,7865
NetR30_1: R30.1 U6.28 | length 759.3
  Top Layer w10: U6.28@10899.21,7203.15 10951.85,7203.15 10965,7190 10965,7060 11346.54,6678.46 R30.1@11346.54,6660
NetR31_1: R31.1 U6.32 | length 735.8
  Top Layer w10: U6.32@10899.21,7281.89 10968.11,7281.89 11000,7250 11000,7070 11230,6840 R31.1@11346.54,6840
NetR33_2: R33.2 U6.78 | length 2015
  Top Layer w10: v1(10160,7670) 10233.15,7596.85 U6.78@10300.79,7596.85 ; v1(11200,7140) 11246.54,7186.54 R33.2@11246.54,7220
  Bottom Layer w10: v1(10160,7670) 10145,7670 10125,7650 10125,7505 10115,7495 10115,7220 10375,6960 10935,6960 11115,7140 v1(11200,7140)
NetR34_2: R34.2 U6.77 | length 2772.1
  Top Layer w10: v1(10170,7725) 10195,7700 10195,7668.07 10246.54,7616.54 U6.77@10300.79,7616.54 ; R34.2@11046.54,7500 11091.54,7455 v1(11095,7455)
  Bottom Layer w10: v1(10170,7725) 10145,7725 10100,7680 10100,7530 10080,7510 10080,7065 10285,6860 11060,6860 11155,6955 11155,7015 11245,7105 11245,7145 11150,7240 11150,7400 v1(11095,7455)
NetR35_1: R35.1 U8.17 | length 119.1
  Top Layer w10: U8.17@11451.22,7498.39 11535.08,7498.39 R35.1@11560,7473.46
NetR35_2: R35.2 U6.100 | length 1902.2
  Top Layer w10: v1(10265,6935) 10265,7127.99 U6.100@10300.79,7163.78 ; v1(11116.85,7016.85) 11165,7065 11435,7065 v1(11570,7200) ; R35.2@11560,7406.54 11560,7340 v1(11570,7330)
  Bottom Layer w10: v1(10265,6935) 10305,6895 10995,6895 v1(11116.85,7016.85) ; v1(11570,7200) v1(11570,7330)
NetR36_1: R36.1 U6.99 U8.7 | length 1837.7
  Top Layer w10: v1(10230,7030) 10230,7165 10248.46,7183.46 U6.99@10300.79,7183.46 ; v1(11110,7060) 11110,7155 11245,7290 11265,7290 11315,7340 11315,7395 11288.39,7421.61 11171.61,7421.61 11150,7400 R36.1@11113.46,7400
  Bottom Layer w10: v1(10230,7030) 10325,6935 10960,6935 11085,7060 v1(11110,7060)
NetR44:IN1_1: R44:IN1.1 U14:IN1.2 | length 142.8
  Top Layer w16: R44:IN1.1@3080,10977.4 3092.4,10965 U14:IN1.2@3217.64,10965
NetR44:IN1_2: R44:IN1.2 U14:IN1.3 | length 125.2
  Top Layer w16: R44:IN1.2@3092.4,10915 U14:IN1.3@3217.64,10915
NetR44:IN2_1: R44:IN2.1 U14:IN2.2 | length 142.8
  Top Layer w16: R44:IN2.1@3080,12477.4 3092.4,12465 U14:IN2.2@3217.64,12465
NetR44:IN2_2: R44:IN2.2 U14:IN2.3 | length 125.2
  Top Layer w16: R44:IN2.2@3092.4,12415 U14:IN2.3@3217.64,12415
NetR44:IN3_1: R44:IN3.1 U14:IN3.2 | length 142.8
  Top Layer w16: R44:IN3.1@3080,9477.4 3092.4,9465 U14:IN3.2@3217.64,9465
NetR44:IN3_2: R44:IN3.2 U14:IN3.3 | length 125.2
  Top Layer w16: R44:IN3.2@3092.4,9415 U14:IN3.3@3217.64,9415
NetR44:IN4_1: R44:IN4.1 U14:IN4.2 | length 142.8
  Top Layer w16: R44:IN4.1@3080,6277.4 3092.4,6265 U14:IN4.2@3217.64,6265
NetR44:IN4_2: R44:IN4.2 U14:IN4.3 | length 125.2
  Top Layer w16: R44:IN4.2@3092.4,6215 U14:IN4.3@3217.64,6215
NetR44:IN5_1: R44:IN5.1 U14:IN5.2 | length 142.8
  Top Layer w16: R44:IN5.1@3080,7777.4 3092.4,7765 U14:IN5.2@3217.64,7765
NetR44:IN5_2: R44:IN5.2 U14:IN5.3 | length 125.2
  Top Layer w16: R44:IN5.2@3092.4,7715 U14:IN5.3@3217.64,7715
NetR44:IN6_1: R44:IN6.1 U14:IN6.2 | length 142.8
  Top Layer w16: R44:IN6.1@3080,4777.4 3092.4,4765 U14:IN6.2@3217.64,4765
NetR44:IN6_2: R44:IN6.2 U14:IN6.3 | length 125.2
  Top Layer w16: R44:IN6.2@3092.4,4715 U14:IN6.3@3217.64,4715
NetR56_1: R56.1 R57.2 R58.2 | length 335.6
  Top Layer w10: R57.2@7800,8833.46 7843.46,8833.46 7953.46,8943.46 R58.2@7953.46,9080
NetU5:ADC2_7: U5:ADC2.7 U7.4 | length 1480.5
  Top Layer w10: U5:ADC2.7@8480.71,6970.31 8575.31,6970.31 8665,7060 8665,7870 8760,7965 U7.4@9074.68,7965
NetU6_51: U6.51 U8.10 | length 807.7
  Top Layer w10: U6.51@10836.22,7699.21 10934.21,7699.21 v1(10945,7710) ; v1(11020,7730) 11125,7730 v1(11240,7615) ; v1(11180.16,7344.84) U8.10@11228.78,7344.84
  Bottom Layer w10: v1(10945,7710) 11000,7710 v1(11020,7730) ; v1(11180.16,7344.84) 11240,7404.68 v1(11240,7615)
NetU6_52: U6.52 U8.3 | length 571.2
  Top Layer w10: U6.52@10816.54,7699.21 10816.54,7746.54 10840,7770 10930,7770 11176.02,7523.98 U8.3@11228.78,7523.98
NetU11:HF1_1: U11:HF1.1 U14:IN1.6 | length 1339.8
  Top Layer w16: U14:IN1.6@3422.36,10915 3485,10915 3525,10875 3525,10705 3595,10635 4045,10635 4185,10775 4310,10775 4335,10800 4335,10880 4315,10900 U11:HF1.1@4280,10900
NetU11:HF2_1: U11:HF2.1 U14:IN4.6 | length 1349.8
  Top Layer w16: U14:IN4.6@3422.36,6215 3495,6215 3535,6175 3535,6005 3605,5935 4055,5935 4195,6075 4320,6075 4345,6100 4345,6180 4325,6200 U11:HF2.1@4290,6200
SEL0:A21: JP1:A21.2 U1:A21.5 | length 156.9
  Top Layer w10: JP1:A21.2@6245,7560 6284.29,7599.29 U1:A21.5@6284.29,7700.63
SEL0:A22: JP1:A22.2 U1:A22.5 | length 156.9
  Top Layer w10: JP1:A22.2@6320,6060 6359.29,6099.29 U1:A22.5@6359.29,6200.63
SEL0:A23: JP1:A23.2 U1:A23.5 | length 156.9
  Top Layer w10: JP1:A23.2@6320,4560 6359.29,4599.29 U1:A23.5@6359.29,4700.63
SEL1:A21: JP2:A21.2 U1:A21.6 | length 149.2
  Top Layer w10: JP2:A21.2@6425,7560 6425,7679.92 U1:A21.6@6445.71,7700.63
SEL1:A22: JP2:A22.2 U1:A22.6 | length 149.2
  Top Layer w10: JP2:A22.2@6500,6060 6500,6179.92 U1:A22.6@6520.71,6200.63
SEL1:A23: JP2:A23.2 U1:A23.6 | length 149.2
  Top Layer w10: JP2:A23.2@6500,4560 6500,4679.92 U1:A23.6@6520.71,4700.63
SEL2:A21: JP3:A21.2 U2:A21.5 | length 278.3
  Top Layer w10: JP3:A21.2@6825,7460 6825,7480 6964.29,7619.29 U2:A21.5@6964.29,7680.63
SEL2:A22: JP3:A22.2 U2:A22.5 | length 278.3
  Top Layer w10: JP3:A22.2@6900,5960 6900,5980 7039.29,6119.29 U2:A22.5@7039.29,6180.63
SEL2:A23: JP3:A23.2 U2:A23.5 | length 278.3
  Top Layer w10: JP3:A23.2@6900,4460 6900,4480 7039.29,4619.29 U2:A23.5@7039.29,4680.63
SEL3:A21: JP4:A21.2 U2:A21.6 | length 228.6
  Top Layer w10: U2:A21.6@7125.71,7680.63 7125.71,7479.29 JP4:A21.2@7145,7460
SEL3:A22: JP4:A22.2 U2:A22.6 | length 228.6
  Top Layer w10: U2:A22.6@7200.71,6180.63 7200.71,5979.29 JP4:A22.2@7220,5960
SEL3:A23: JP4:A23.2 U2:A23.6 | length 228.6
  Top Layer w10: U2:A23.6@7200.71,4680.63 7200.71,4479.29 JP4:A23.2@7220,4460
TCK: JP6.6 R34.1 U8.6 | length 823.5
  Top Layer w10: R34.1@11113.46,7500 11113.46,7496.54 11162.8,7447.2 11307.8,7447.2 11395,7360 11395,7315 11425,7285 11585,7285 11677.48,7377.48 JP6.6@11781.26,7377.48
TDI: JP6.10 U8.4 | length 667.1
  Top Layer w10: U8.4@11228.78,7498.39 11278.39,7498.39 11435,7655 11590,7655 11710.04,7534.96 JP6.10@11781.26,7534.96
TDO: JP6.8 R32.1 U6.76 | length 3676.3
  Top Layer w10: v1(10095,7745) 10125,7775 10175,7775 10230,7720 10230,7685 10278.78,7636.22 U6.76@10300.79,7636.22 ; 11565,7675 11593.46,7703.46 R32.1@11593.46,7720 11625,7720 v1(11650,7695)
  Bottom Layer w10: v1(10095,7745) 10070,7720 10070,7585 10040,7555 10040,7040 10250,6830 11080,6830 11225,6975 11520,6975 11655,7110 11655,7329.96 JP6.8@11781.26,7456.22 11748.78,7456.22 11650,7555 v1(11650,7695)
TMS: JP6.4 R33.1 U8.5 | length 825.8
  Top Layer w10: U8.5@11228.78,7472.8 v1(11297.2,7472.8) ; R33.1@11313.46,7220 11315,7220 v1(11370,7275) 11405,7240 11660,7240 11718.74,7298.74 JP6.4@11781.26,7298.74
  Bottom Layer w10: v1(11297.2,7472.8) 11370,7400 v1(11370,7275)
VCC: C38.2 C39.1 C40.1 C41.1 C42.1 C43.1 C44.1 C45.1 C46.1 C47.1 C75.1 JP6.2 O1.1 O1.8 R32.2 R36.2 R37.2 U6.6 U6.19 U6.31 U6.46 U6.57 U6.70 U6.83 U6.94 U7.16 U8.18 U8.19 U8.20 U16.17 U16.18 U16.19 | length 2056.9
  Top Layer w10: U7.16@9285.31,8115 9285.31,8115.31 v1(9320,8150) ; 10236.57,7498.43 U6.83@10300.79,7498.43 ; v1(10240,7265) 10256.89,7281.89 U6.94@10300.79,7281.89 ; v1(10435,7035) 10462.2,7062.2 U6.6@10462.2,7100.79 ; v1(10440,7760) 10462.2,7737.8 U6.70@10462.2,7699.21 ; U6.19@10718.11,7100.79 10718.11,7061.89 v1(10735,7045) ; U6.57@10718.11,7699.21 10718.11,7743.11 v1(10735,7760) ; U6.31@10899.21,7262.2 10937.8,7262.2 v1(10960,7240) ; U6.46@10899.21,7557.48 10952.48,7557.48 v1(10965,7570) ; v1(10938.2,8028.2) U16.17@10938.2,8085 ; O1.1@10940,6560 10970,6560 v1(11020,6610) ; O1.8@10940,6741.1 10973.9,6741.1 v1(11015,6700) ; v1(10940,7960) C75.1@11000.94,7960 ; U16.18@10963.8,8085 10963.8,8036.2 11000.94,7999.06 v1(11000.94,7895.94) ; U16.19@10989.4,8085 10989.4,8040.6 v1(11000,8030) ; v1(11046.54,7221.54) R37.2@11046.54,7260 ; R36.2@11046.54,7400 v1(11046.54,7438.46) ; U8.18@11451.22,7523.98 v1(11513.98,7523.98) 11513.98,7566.02 11504.84,7575.16 U8.20@11451.22,7575.16 ; U8.19@11451.22,7549.57 11500.43,7549.57 v1@11513.98,7536.02 ; v1(11480,7720) R32.2@11526.54,7720
  Bottom Layer w10: C38.2@9280,8125.21 9304.79,8150 v1(9320,8150) ; v1(10230,7510) 10240,7520 C40.1@10278.29,7520 ; 10236.57,7498.43 C40.1@10258.15,7520 ; v1(10240,7265) 10281.54,7265 C41.1@10286.54,7260 ; C42.1@10425,7065 10435,7055 v1(10435,7035) ; C47.1@10440,7713.46 v1(10440,7760) ; v1(10735,7045) 10735,7053.29 C43.1@10760,7078.29 ; v1(10735,7760) 10735,7726.71 C46.1@10740,7721.71 ; C44.1@10921.71,7240 v1(10960,7240) ; C45.1@10933.46,7600 10963.46,7570 v1(10965,7570) ; C39.1@11015,6660 v1(11015,6700) ; C39.1@11018.29,6660 11020,6658.29 v1(11020,6610)
VOS: JP5:A21.1 JP5:A22.1 JP5:A23.1 U3:A11.5 U3:A12.5 U3:A13.5 U19.2 U19.6 | length 12664.4
  Top Layer w10: U3:A12.5@6445,9312.64 6445,9220 6400,9175 6400,8730 6565,8565 6915,8565 6930,8580 7880,8580 8005,8705 8005,8780 ; U3:A11.5@6445,10817.64 6445,10740 6415,10710 6415,10230 6930,9715 6930,9515 v1(7070,9375) ; v1(7070,8880) 7370,8580 ; v1(7570,7945) 7570,8475 7675,8580 ; v1(7615,7455) 7620,7450 7620,6590 v1(7745,6465) ; v1(7740,5165) 7740,6095 v1(7745,6100) ; U19.2@7918.31,8792.8 7992.2,8792.8 8017.8,8767.2 U19.6@8081.69,8767.2
  Top Layer w16: U3:A13.5@6450,12315 6450,12250 6410,12210 6410,11800 6915,11295 v1(6915,10775) ; 6673.55,9971.45 v1(6870,10167.9)
  Bottom Layer w10: v1(6870,10167.9) 6870,10730 v1(6915,10775) ; v1(7070,8880) v1(7070,9375) ; JP5:A21.1@7460,7460 7610,7460 v1(7615,7455) 7615,7900 v1(7570,7945) ; JP5:A23.1@7540,4460 7630,4550 7630,5055 v1(7740,5165) ; JP5:A22.1@7540,5960 7745,6165 ; v1(7745,6100) v1(7745,6465)
VREF: C89.1 C91.1 R47.2 R51.2 U20.6 U20.7 | length 1933.9
  Top Layer w10: U20.6@7901.69,8307.2 7938.78,8307.2 7992.52,8360.94 8225.94,8360.94 8320,8455 R47.2@8320,9064.88 ; U20.7@7901.69,8332.79 7942.21,8332.79 v1@7955,8320 ; C89.1@8100,8360.94 8285,8175.94 R51.2@8285,7705
  Bottom Layer w10: C91.1@7900,8321.71 v1(7953.29,8321.71)
pads on no net: J1.0 J6.0 J11.0 J16.0 J21.0 J26.0 JP6.12 JP6.14 POWER-A1.0 POWER-D1.0 U6.1 U6.2 U6.4 U6.5 U6.8 U6.9 U6.11 U6.12 U6.13 U6.14 U6.15 U6.16 U6.17 U6.21 U6.22 U6.23 U6.27 U6.30 U6.34 U6.35 U6.36 U6.37 U6.39 U6.40 U6.43 U6.44 U6.47 U6.49 U6.50 U6.53 U6.54 U6.55 U6.59 U6.60 U6.61 U6.62 U6.63 U6.88 U6.90 U6.91 U6.96 U6.97 U6.98 U7.7 U7.10 U8.2 U8.9 U8.12 U8.13 U8.14 U8.15 U8.16 U9:H1.1 U9:H1.5 U9:H1.8 U9:H2.1 U9:H2.5 U9:H2.8 U10:H1.5 U10:H2.5 U11:HF1.5 U11:HF2.5 U12:HF1.1 U12:HF1.5 U12:HF1.8 U12:HF2.1 U12:HF2.5 U12:HF2.8 U13:HFS1.1 U13:HFS1.5 U13:HFS1.8 U13:HFS2.1 U13:HFS2.5 U13:HFS2.8 U16.1 U16.4 U16.7 U16.11 U16.15 U16.16 U16.20 U16.P0 U17.7 U18.5 U18.8 U19.1 U19.5 U19.8 U20.5 U20.8

## Polygon pours and split planes (outlines as drawn)
+5VCC on Top Layer (solid): 11950,7820 11211.76,7820 11211.76,8250 10695,8250 10695,8625 11950,8625
+2.5VCC on Top Layer (solid): 10905,6625 10115,6625 10115,7730 11005,7730 11005,6630 10890,6630
+1.2VCC on Bottom Layer (solid): 11200,8045 10225,8045 10225,6985 11207.74,6985 11207.74,8045
+5VCC on Bottom Layer (solid): 11939.67,8065 11939.67,6505 9995,6505 9995,8330 11945,8330 11945,7975 11923.69,7975
AVSS on Bottom Layer (solid): 11940,12935 2050,12935 2050,3055 9000,3055 9000,10165 11950,10165 11950,12935
AGND on Internal Plane 1 (split plane): 8391.47,6471.44 cw(c8395,6475) 8389.99,6475 8389.99,6920 cw(c8395,6920) 8400.01,6920 8400.01,6477.08 8507.08,6370.02 9032.92,6370.02 9170.06,6507.16 9170.06,8799.11 cw(c9175,8800) 9169.99,8800 9169.99,9802.92 9112.92,9859.99 8442.08,9859.99 8400.01,9817.92 8400.01,9520 cw(c8395,9520) 8389.99,9520 8389.99,9820 cw(c8395,9820) 8391.47,9823.56 8391.45,9823.55 8436.45,9868.55 8436.44,9868.53 cw(c8440,9865) 8440,9870.01 9115,9870.01 cw(c9115,9865) 9118.56,9868.53 9118.55,9868.55 9178.55,9808.55 9178.53,9808.56 cw(c9175,9805) 9180.01,9805 9180.01,8804.94 11979.99,8804.94 11979.99,12979.99 2020.02,12979.99 2020.02,3020.01 11979.99,3020.01 11979.99,6500.06 9177.16,6500.06 9038.55,6361.45 9038.56,6361.47 cw(c9035,6365) 9035,6359.98 8505,6359.98 cw(c8505,6365) 8501.44,6361.47 8501.45,6361.45
GND on Internal Plane 1 (split plane): 9179.94,6509.94 9179.94,8795.06 11979.99,8795.06 11979.99,6509.94
AVDD on Internal Plane 2 (split plane): 2020.02,3020.01 2020.02,12979.99 11979.99,12979.99 11979.99,8804.94 9175,8804.94 ccw(c9175,8800) 9170.06,8800 9170.06,6505 ccw(c9175,6505) 9175,6500.06 11979.99,6500.06 11979.99,3020.01
VCC on Internal Plane 2 (split plane): 9179.94,6509.94 11979.99,6509.94 11979.99,8795.06 9179.94,8795.06

## Keep-outs
Keep-Out Layer:
  lines w10: 2050,3050 11950,3050 11950,12950 2050,12950 2050,3050

## Other copper
Top Layer:
  text "Layer 1" at 12275,4330 h60
Bottom Layer:
  text "Layer 4" at 12275,4020 h60
Internal Plane 1 (plane layer: these items are gaps in the copper):
  lines w9.84: 12000,6505 9175,6505 9175,8800 12000,8800
  lines w10: 8395,6920 8395,6475 8505,6365 9035,6365 9175,6505 ; 8395,7070 8395,9410 ; 8395,9520 8395,9820 8440,9865 9115,9865 9175,9805 9175,8800
  text "Layer 2" at 12275,4220 h60
Internal Plane 2 (plane layer: these items are gaps in the copper):
  lines w9.84: 12000,6505 9175,6505 9175,8800 12000,8800
  text "Layer 3" at 12275,4125 h60

## Silkscreen, mask and mechanical layers (free items; w line width, h text height)
Top Overlay:
  text "Analog Test Board 3" at 8140,3415 h240
Mechanical 5:
  the board outline again, w1
Drill Drawing:
  text ".LEGEND" at 12200,3200 h60
  text "Drill Drawing." at 12200,3100 h60

## Dimensions
2050,3050 to 11950,3050 on Mechanical 1
2050,3050 to 2050,12950 on Mechanical 1

## Text inside footprints (layer, text, board x,y; h text height)
JP9:PGA1: Top Overlay "1" at 5525,10820 h50 r90; Top Overlay "2" at 5425,10800 h50 r90; Top Overlay "5" at 5525,11160 h50 r90; Top Overlay "6" at 5425,11160 h50 r90
JP9:PGA2: Top Overlay "1" at 5465,9320 h50 r90; Top Overlay "2" at 5365,9300 h50 r90; Top Overlay "5" at 5465,9660 h50 r90; Top Overlay "6" at 5365,9660 h50 r90
JP9:PGA3: Top Overlay "1" at 5620,12320 h50 r90; Top Overlay "2" at 5520,12300 h50 r90; Top Overlay "5" at 5620,12660 h50 r90; Top Overlay "6" at 5520,12660 h50 r90
JP9:PGA4: Top Overlay "1" at 5620,6120 h50 r90; Top Overlay "2" at 5520,6100 h50 r90; Top Overlay "5" at 5620,6460 h50 r90; Top Overlay "6" at 5520,6460 h50 r90
JP9:PGA5: Top Overlay "1" at 5620,4620 h50 r90; Top Overlay "2" at 5520,4600 h50 r90; Top Overlay "5" at 5620,4960 h50 r90; Top Overlay "6" at 5520,4960 h50 r90
JP9:PGA6: Top Overlay "1" at 5650,7620 h50 r90; Top Overlay "2" at 5550,7600 h50 r90; Top Overlay "5" at 5650,7960 h50 r90; Top Overlay "6" at 5550,7960 h50 r90
P1: Top Overlay "2" at 10560,8380 h50 r180; Top Overlay "1" at 10560,8480 h50 r180; Top Overlay "19" at 9500,8480 h50 r180; Top Overlay "20" at 9500,8380 h50 r180